# Altium PCB 驱动.PcbDoc
Units mil, origin at the board's own origin, x right, y up, seen from the top; angles counter-clockwise.
Board outline 8132 x 3728 mil, 2 copper layers (Top Layer, Bottom Layer); 46 components, 43 nets, 205 pads, 134 vias.
Unrouted connection lines stored in the file: 2.
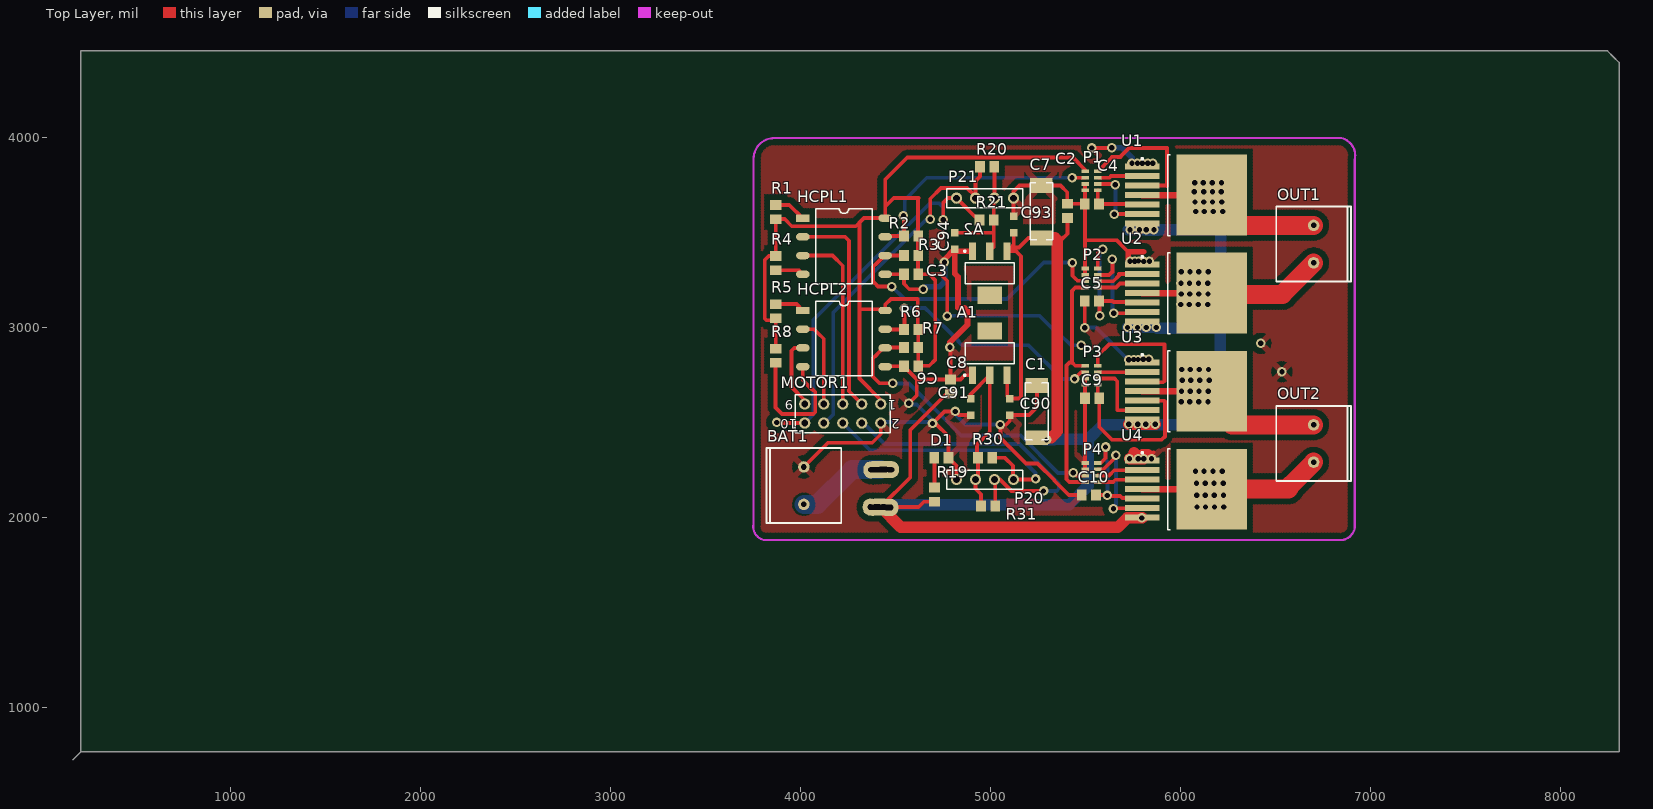
[diagram p0: Top Layer view]
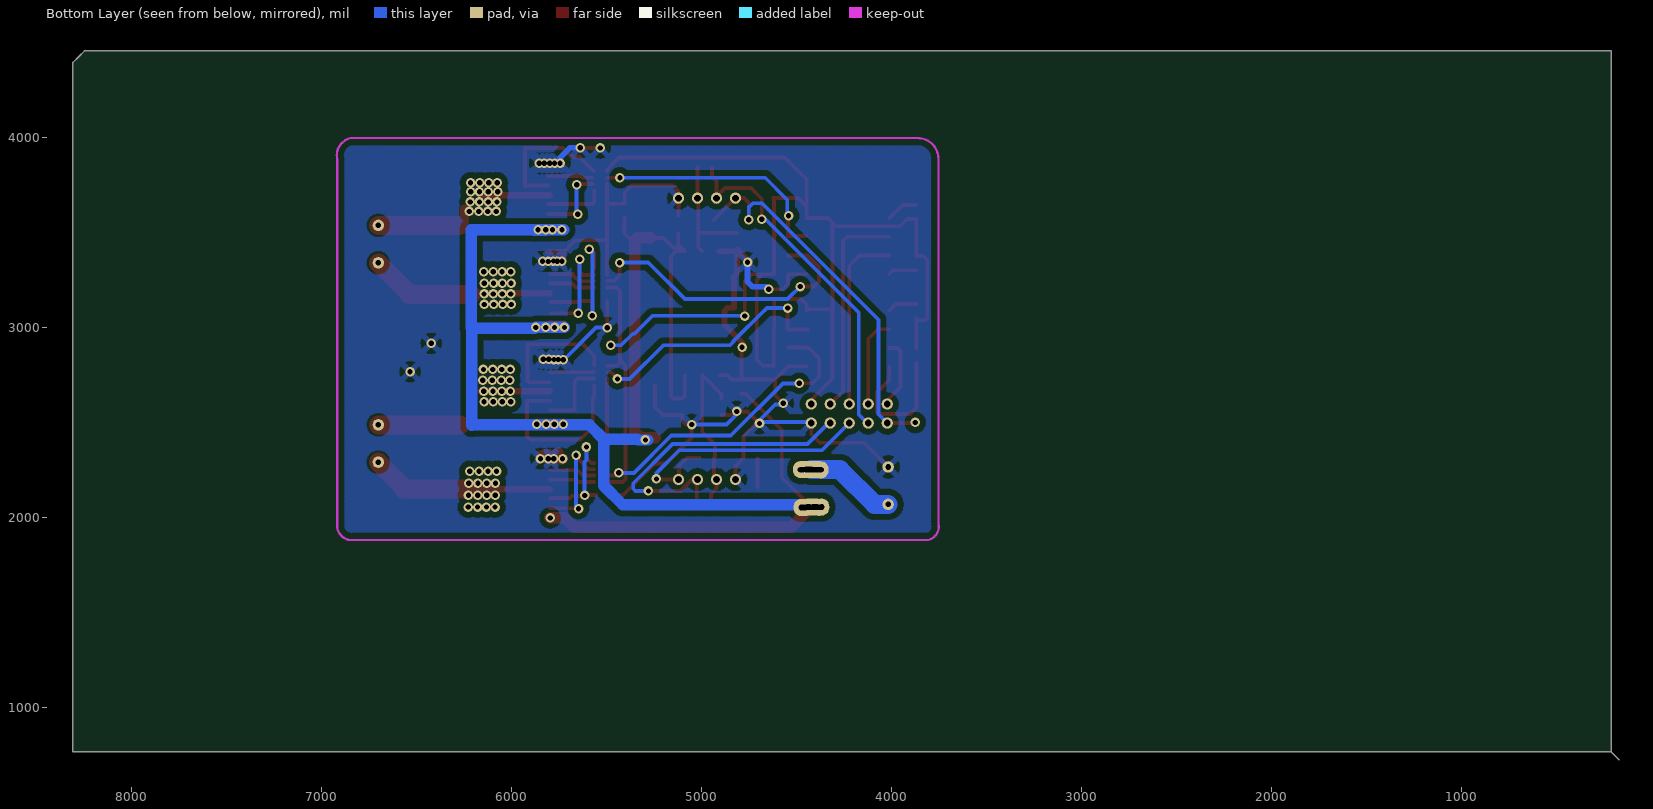
[diagram p1: Bottom Layer view, seen from below]

## Layer stack, top to bottom
Top Layer: signal copper 1.4
Dielectric: dielectric 12.6, FR-4, Dk 4.8
Bottom Layer: signal copper 1.4

## Board outline
215,4455 8246,4455 8276,4425 8306,4395 8306,768 215,768 174,727 215,768 215,4455

## Design rules (kind name [scope] priority, off if disabled: settings)
Clearance [All] p1: gap=30
FabricationTestPointUsage TestPointUsage [All] p1: valid=0 allowmultiple=FALSE
FabricationTestpoint Testpoint [All] p1: side=3 testpointundercomponent=TRUE minsize=40 maxsize=100 preferedsize=60 minholesize=0 maxholesize=40 preferedholesize=32 testpointgrid=1 allowsidetop=TRUE allowsidebottom=TRUE usegrid=TRUE gridtolerance=0.01
PlaneConnect [All] p1: planeconnectstyle=Relief reliefexpansion=20 reliefentries=4 reliefconductorwidth=30 reliefairgap=15
PolygonConnect [All] p1: connectstyle=Relief reliefconductorwidth=30 reliefentries=4 polygonreliefangle="45 Angle"
RoutingVias [All] p1: holewidth=28 width=50 viastyle="Through Hole" minholewidth=28 minwidth=50 maxholewidth=28 maxwidth=50
SilkscreenOverComponentPads [All] p1: minsilkscreentomaskgap=10
SolderMaskExpansion [All] p1: expansion=4
Width [All] p1: maxlimit=100 minlimit=15 preferedwidth=20
24 further rules are at their usual default settings.

## Components (designator, comment, footprint, x,y, rotation, side; value= is the part's Value field where it differs from the comment)
A1 "其它" AMS1117——5v电源#1 4996,2866 r90 top
A2 "其它" AMS1117——5v电源#2 4996,3286 r270 top
BAT1 "Header 2" 接口2 4018,2267.3 r0 top
C1 "Cap Pol1" CAPM6130X20N 5244,2526 r90 top
C2 "Cap" 2012[0805] 5405,3614 r270 top
C3 "Cap" 2012[0805] 4582,3281 r0 top
C4 "Cap" 2012[0805] 5533,3650 r180 top
C5 "Cap" 2012[0805] 5533,3139.33 r180 top
C6 "Cap" 2012[0805] 4582,2797 r180 top
C7 "Cap Pol1" CAPM6130X20N 5268,3577 r90 top
C8 "Cap" 2012[0805] 4790,2690 r270 top
C9 "Cap" 2012[0805] 5535,2629 r180 top
C10 "Cap" 2012[0805] 5517,2119 r180 top
C90 "钽电容" 10uF的钽电容 5101,2627 r270 top
C91 "22钽电容" 10uF的钽电容 4895,2627 r270 top
C93 "钽电容" 10uF的钽电容 5122,3499 r90 top
C94 "22钽电容" 10uF的钽电容 4812,3499 r270 top
D1 "LED0" M0805 4704,2315 r0 top
HCPL1 "" HCPL2630 4012.93,3576 r0 top
HCPL2 "" HCPL2630 4012.93,3090 r0 top
MOTOR1 "dianji" HDR2X5 4423,2598 r180 top
OUT1 "Header 2" 接口2 6700,3341 r180 top
OUT2 "Header 2" 接口2 6700,2292 r180 top
P1 "Header 4X2H" 排阻 5531,3772 r270 top
P2 "Header 4X2H" 排阻 5531,3260.67 r90 top
P3 "Header 4X2H" 排阻 5531,2749 r270 top
P4 "Header 4X2H" 排阻 5531,2238 r90 top
P20 "Header 4" HDR1X4 4821,2201 r0 top
P21 "Header 4" HDR1X4 5121,3681 r180 top
R1 "Res2" 2012[0805] 3870,3608 r270 top
R2 "Res2" 2012[0805] 4582,3482 r180 top
R3 "Res2" 2012[0805] 4582,3380 r180 top
R4 "Res2" 2012[0805] 3870,3339 r90 top
R5 "Res2" 2012[0805] 3870,3086 r270 top
R6 "Res2" 2012[0805] 4582,2990 r180 top
R7 "Res2" 2012[0805] 4583,2896 r180 top
R8 "Res2" 2012[0805] 3870,2852 r90 top
R19 "Res2" 2012[0805] 4706,2121 r270 top
R20 "Res Semi" 2012[0805] 4982,3846 r0 top
R21 "Res Semi" 2012[0805] 4980,3566 r0 top
R30 "Res Semi" 2012[0805] 4972,2315 r180 top
R31 "Res Semi" 2012[0805] 4988,2061.38 r180 top
U1 "BTS7971B" TO127P1615X238-8N 6023,3687 r270 top
U2 "BTS7971B" TO127P1615X238-8N 6023,3171.33 r270 top
U3 "BTS7971B" TO127P1615X238-8N 6023,2655.67 r270 top
U4 "BTS7971B" TO127P1615X238-8N 6023,2140 r270 top

## Footprints (in the part's own frame and the unit in brackets; to place one, negate y for a bottom-side part, rotate by r counter-clockwise, add the part's x,y. Pads: shape width x height; smd on the part's side, far side on the other; paste and mask are expansions set on the pad)
10uF的钽电容 [mm]
  rect 1x1 smd: 1(0,0) 2(2.21,0)
2012[0805] [mm] "Chip Resistor; Body 2.0 x 1.3 mm"
  rect 1.3x1.5 smd: 1(-0.95,0) 2(0.95,0)
AMS1117——5v电源#1 [mm] "SOT223, 4-Leads, Body 6.5x7.3mm (max), Pitch 2.30m"
  rect 2.3x0.95 smd: 1(-2.95,2.3) 2(-2.95,0) 3(-2.95,-2.3)
  rect 2.3x3.3 smd: 4(2.95,0)
  silkscreen extent -3.07,-3.25 1.4,3.45, body extent -1.9,-3.25 1.9,3.25, height 1.8
AMS1117——5v电源#2 [mm] "SOT223, 4-Leads, Body 6.5x7.3mm (max), Pitch 2.30m"
  rect 2.3x0.95 smd: 1(-2.95,-2.3) 2(-2.95,0) 3(-2.95,2.3)
  rect 2.3x3.3 smd: 4(2.95,0)
  silkscreen extent -3.07,-3.45 1.4,3.25, body extent -1.9,-3.25 1.9,3.25, height 1.8
CAPM6130X20N [mm] "Molded Capacitor, 2-Leads, Body 6.1x3.0mm, IPC Medi"
  rect 2x3 smd: 1(-2.675,0) 2(4.318,0)
  silkscreen extent -2.92,-1.52 4.7,1.52, body extent -3.1,-1.5 4.95,1.5, height 2
HCPL2630 [mm]
  rect 1.8x1 smd: 1(0,0)
  oval 1.8x1 smd: 2(0,-2.5) 3(0,-5) 4(0,-7.5) 5(11,-7.5) 6(11,-5) 7(11,-2.5) 8(11,0)
  silkscreen extent 1.74,-8.75 9.27,1.25
HDR1X4 [mm] "Connector; Header; 4 Posit"
  round 1.5 hole 0.9: 1(0,0) 2(2.54,0) 3(5.08,0) 4(7.62,0)
  silkscreen extent -1.27,-1.27 8.89,1.27
HDR2X5 [mm] "Connector; Header; 5x2 Posit"
  round 1.5 hole 0.9: 1(0,0) 2(0,2.54) 3(2.54,0) 4(2.54,2.54) 5(5.08,0) 6(5.08,2.54) 7(7.62,0) 8(7.62,2.54) 9(10.16,0) 10(10.16,2.54)
  silkscreen extent -1.27,-1.27 11.43,3.81
M0805 [mm]
  rect 1.3x1.5 smd: 1(0,0) 2(1.9,0)
TO127P1615X238-8N [mm]
  rect 0.8x4.6 smd: 1(-4.064,-5.723) 2(-2.794,-5.723) 3(-1.524,-5.723) 4(-0.254,-5.723) 5(1.016,-5.723) 6(2.286,-5.723) 7(3.556,-5.723)
  rect 10.8x9.4 smd: 8(-0.254,3.577)
  silkscreen extent -5.65,-5.85 5.15,-1.97
排阻 [mm]
  rect 0.5x1 smd: 1(-1.27,-0.847) 2(-1.27,0.847) 3(-0.423,-0.847) 4(-0.423,0.847) 5(0.423,-0.847) 6(0.423,0.847) 7(1.27,-0.847) 8(1.27,0.847)
接口2 [mil]
  round 60 hole 30: 1(0,0) 2(0,-196.85)
  silkscreen extent -197,-295 197,98

## Part data
A1 A2: library part ASM1117——5v电源芯片
C1 C7: "Polarized Capacitor (Radial)"
C2 C3 C4 C5 C6 C8 C9 C10: "Capacitor"
D1: "Typical INFRAR"
HCPL1 HCPL2 U1 U2 U3 U4: library part C
MOTOR1: library part "Header 5X2", "Header, 5-Pin, Dual row"
P1 P2 P3 P4: "Header, 4-Pin, Dual row,"
P20 P21: "Header, 4-Pin"
R1 R2 R3 R4 R5 R6 R7 R8 R19: "Resistor"
R20 R21 R30 R31: "Semiconductor Resistor"

## Free pads (board coordinates)
  oval 80x90 hole 30: 0(4371,2252) 1(4381,2253) 2(4391,2253) 3(4404,2253) 4(4413,2253) 5(4422,2253.36) 6(4422,2253.36) 7(4440,2254) 8(4430,2254) 9(4450,2254) 10(4450,2254) 11(4468,2253) 12(4468,2253) 13(4468,2253) 14(4479,2253) 15(4468,2253) 16(4468,2253) 17(4368,2056) 18(4368,2056) 19(4381,2055) 20(4381,2055) 21(4381,2055) 22(4393,2056) 23(4404,2056) 24(4422,2055.72) 25(4413,2056) 26(4404,2056) 27(4432,2056) 28(4432,2056) 29(4441,2056) 30(4441,2056) 31(4453,2054) 32(4462,2054) 33(4462,2054) 34(4476,2054) 35(4453,2054) 36(4453,2054)

## Via types
v1: diameter 50, hole 28, Top Layer to Bottom Layer, 134 vias

## Nets (pads, with @x,y where several pads share a name; then routed paths per layer and width w, separated by ;. In a path a pad name is that pad's centre, name@x,y a point inside that pad or via, vN(x,y) a via of type N, cw(c..) or ccw(c..) an arc to the next point about the centre after c; other vN are vias at no path point)
5V: C3.2 C6.1 HCPL1.8 HCPL2.8 MOTOR1.1 P1.1 P2.2 P3.1 P4.2 R1.2 R2.1 R3.1 R4.2 R5.2 R6.1 R7.1 R8.2 | length 7998.7
  Top Layer w20: R8.2 R5.2 ; R5.2@3870,3039 3822,3039 3813,3048 3813,3356 3833.4,3376.4 R4.2 R1.2 3917.4,3570.6 3955,3533 4291,3533 4334,3576 HCPL1.8 4446,3778 4562,3894 5434,3894 5497.67,3830.33 P1.1 ; 4310.72,3096.28 4439.72,3096.28 HCPL2.8 4446,3120 4477,3151 4617,3151 4617,2992.4 4620.4,2989 C6.1@4620.4,2798 ; 4310.72,3552.72 4310.72,2732.28 4423,2620 MOTOR1.1 ; 4446,3636 4491,3681 4622,3681 4619.4,3678.4 C3.2 4737,3281 4773,3245 v1(4773,3061) ; R2.1@4613,3488.4 R2.1 ; C6.1@4621.4,2799 4678,2799 4709,2830 4709,3250 4678,3281 ; P4.2 5414,2188 5400,2202 5400,2801 5416,2817 5428,2817 ; P3.1 5446,2799 5428,2817 ; P2.2 5445.67,3210.67 5428,3193 5428,2817
  Bottom Layer w20: v1@4773,3062 5258,3062 5352,2968 5362,2968 5423,2907 v1(5478,2907)
BAT: BAT1.2 pad.0 pad.1 pad.2 pad.3 pad.4 pad.5 pad.6 pad.7 pad.8 pad.9 pad.10 pad.11 pad.12 pad.13 pad.14 pad.15 pad.16 | length 479.8
  Bottom Layer w100: BAT1.2 4089.45,2070.45 4272.36,2253.36 pad.5
"BAT IN": A1.3 A2.3 C1.1 C2.2 C7.1 C8.2 C90.1 C93.1 pad.17 pad.18 pad.19 pad.20 pad.21 pad.22 pad.23 pad.24 pad.25 pad.26 pad.27 pad.28 pad.29 pad.30 pad.31 pad.32 pad.33 pad.34 pad.35 pad.36 R19.2 U1.7 U2.7 U3.7 U4.7 | length 9822.9
  Top Layer w20: R19.2 4650.6,2083.6 4622.72,2055.72 pad.24 4578,2211.72 4578,2461 4769.6,2652.6 C8.2 ; A1.3@5088.55,2749.86 5088.55,2639.45 C90.1 5148,2627 5160,2639 5160,3375 5146,3389 5146,3390 5133.86,3402.14 A2.3 5122,3437.59 C93.1 ; 5106.41,3422 5150.63,3422 5200.31,3471.69 C7.1 ; 5345,3466 5377,3466 5405,3494 C2.2 ; v1(5721,3001) 5721,3028 5794.35,3028 U2.7 ; v1@5728,2488 v1(5728,2492)
  Top Layer w60: pad.24 4527.72,1950 5670,1950 5720,2000 U4.7 ; C1.1 5318.69,2420.69 5352,2454 5352,3459 5339.31,3471.69 C7.1 ; v1(5728,2492) v1(5866,2492)
  Bottom Layer w60: pad.24 4435.28,2069 5415,2069 5514,2168 5514,2413 ; v1@5282,2409 5333,2409 5337,2413 5514,2413 ; v1(5721,3001) v1(5872,3001) 5877,2996 6208,2996 ; v1@5725,3515 v1@5874,3515 ; v1@5822,3512 5880,3512 5883,3515 6211,3515 6211,2999 6208,2996 ; 5514,2413 5589,2488 6206,2488 6208,2486 6208,2996
  other v1: 5796,1999 5295,2409 5775,2492 5816,2492 5773,3001 5820,3001 5734,3515 5784,3515 5820,3515 5860,3515
DIANJI1-5V: A2.2 C94.1 P21.2 R20.2 R21.2 | length 658.4
  Top Layer w20: C94.1 5016.4,3499 5017.4,3500 ; A2.2 5017.4,3423.54 5017.4,3677.4 P21.2 R20.2@5021,3844.4
DIANJI-5V: A1.2 C91.1 P20.2 R30.2 R31.2 | length 848.4
  Top Layer w20: C91.1 4895,2648.86 A1.2 4996,2452 4929,2385 R30.2@4929,2320.6 ; P20.2 4921,2153 4950.6,2123.4 R31.2@4950.6,2087 ; P20.2@4934.6,2214.6 R30.2
GND: A1.1 A2.1 BAT1.1 C1.2 C2.1 C3.1 C4.2 C5.2 C6.2 C7.2 C8.1 C9.2 C10.2 C90.2 C91.2 C93.2 C94.2 D1.2 HCPL1.5 HCPL2.5 MOTOR1.2 P1.5 P1.7 P2.6 P2.8 P3.5 P3.7 P4.6 P4.8 P20.1 P21.1 U1.1 U2.1 U3.1 U4.1 | length 7758.1
  Top Layer w20: BAT1.1 4144.7,2394 4378,2394 4423,2439 MOTOR1.2 ; HCPL1.5@4446.28,3281 C3.1 4544.6,3230.4 4573,3202 v1(4647,3202) ; HCPL2.5@4448.28,2797 C6.2 4544.6,2795.4 4612.6,2727.4 ; v1(4569.5,2601.5) 4612.6,2644.6 4612.6,2727.4 ; v1(4787,2896) 4790,2893 C8.1 ; P20.1 4821,2272.8 D1.2 4778.8,2428.2 4711,2496 v1(4695,2496) 4758,2559 v1(4815,2559) 4834,2540 C91.2 ; A1.1 4864.86,2749.86 4842.4,2727.4 4612.6,2727.4 ; v1(5052,2490) 5052,2420 5186,2286 5248,2286 5335.03,2198.97 5335.03,2195.97 5412,2119 ; 5083,2490 5101,2508 C90.2 5202,2540 5244,2582 C1.2 ; C93.2@5121,3602 5121,3716 5152,3747 5369,3747 5404,3712 5404,3652.4 C2.1 C4.2@5494.2,3651.4 ; P21.1 P21.1@5137,3665 ; C93.2 5122,3612 ; 5415,2119 C10.2 ; v1(5495.6,3000) C5.2 ; C9.2 5497.6,2288.07 P4.8 P4.6 ; 5497.6,3460 5663,3460 5724,3399 ; P1.7@5497.6,3712.93 5497.6,3310.73 P2.8 P2.6 ; C9.2@5497.67,2629.07 P3.5 ; P1.7 P1.5 ; v1(5533,3945) v1@5637,3945 ; v1(5847,2311) 5847,2333 5858,2344
  Top Layer w30: v1(4758,3343) 4758,3358 C94.2 4812,3283.78 4829,3266.78 4829,3104 4862,3104 4879,3087 4879,3015 4787,2923 v1(4787,2896) ; C94.2@4821.86,3402.14 A2.1 ; v1(5734,3349) 5724,3359 5724,3399 5805,3399
  Top Layer w60: v1(5731,2311) v1(5777,2311) 5790,2324 5793,2324 5800,2331 5827,2331 5807,2311 5786,2311 5755,2342 5755,2335
  Bottom Layer w20: MOTOR1.2@4429,2504 4687,2504 v1(4695,2496) 4695,2512.29 4612,2595.29 4575.71,2595.29 v1(4569.5,2601.5) ; v1(4815,2559) 4815,2543 4868,2490 v1(5052,2490) ; v1(5495.6,3000) 5554.48,3000 v1@5723.48,2831
  Bottom Layer w30: v1@4660,3215 4732,3215 4758,3241 v1(4758,3343) ; v1(5638,3946) 5691,3946 5744,3893 v1(5744,3864)
  other v1: 5806,2311 6533,2768 5727,2831 5753,2832 5776,2832 5803,2833 5832,2833 6422,2917 5807,3348 5758,3349 5836,3349 5779,3350 5773,3864 5799,3864 5828,3864 5853,3864
N1: HCPL1.7 P1.3 R2.2 | length 1280.5
  Top Layer w20: HCPL1.7@4450.43,3482 R2.2 v1@4544.6,3585.4 ; v1(5429,3788) P1.3@5497,3788
  Bottom Layer w20: v1(4542,3588) 4549,3595 4549,3672 4665,3788 v1(5429,3788)
N2: HCPL1.6 P2.4 R3.2 | length 1576.8
  Top Layer w20: v1(4481,3216) 4409,3216 4391,3234 4389,3234 4382,3241 4382,3320 4400,3338 4401,3338 4443,3380 R3.2 ; v1(5431,3341) 5431,3273 5450,3254 ; 5451,3254 5459,3246 5495.67,3246 P2.4
  Bottom Layer w20: v1(4481,3216) 4547,3150 5087,3150 5280,3343 v1@5429,3343
N3: HCPL2.7 P3.3 R6.2 | length 1319.5
  Top Layer w20: HCPL2.7@4440.57,2991.57 4439,2990 R6.2 ; R6.2@4547,2992.4 v1(4547,3103) ; v1(5442,2730) 5477.67,2765.67 P3.3
  Bottom Layer w20: v1(4547,3103) 4656,3103 4666,3093 4667,3093 4831,2929 4831,2926 4850,2907 5200,2907 5378,2729 v1@5421,2729
N4: HCPL2.6 P4.4 R7.2 | length 1611.5
  Top Layer w20: HCPL2.6 4436.15,2893.15 4400,2857 4400,2856 4381,2837 4381,2742 4416,2707 v1(4486,2707) ; HCPL2.6@4448.85,2896 R7.2 ; v1(5436,2236) 5450.67,2221.33 P4.4
  Bottom Layer w20: v1@4487,2706 4572,2706 4846,2432 5159,2432 5355,2236 v1(5436,2236)
NetC4_1: C4.1 P1.8 U1.5 | length 307.6
  Top Layer w20: P1.8 5564.33,3658.07 5572.4,3650 U1.5@5804.69,3650
NetC5_1: C5.1 P2.7 U2.5 | length 774.1
  Top Layer w20: P2.7 5564.33,3392.33 5585,3413 v1(5591,3413) ; C5.1 5641.67,3139.33 5646,3135 U2.5@5794.02,3135 ; v1(5574,3062) C5.1@5574,3135.73
  Bottom Layer w20: v1(5574,3062) 5574,3396 v1(5591,3413)
NetC9_1: C9.1 P3.8 U3.5 | length 911.8
  Top Layer w20: P3.8 5564.33,2637.07 C9.1 5572.4,2477.6 5614,2436 5614,2435 5639,2410 5900,2410 5918,2428 5918,2611.33 5913.67,2615.67 U3.5
NetC10_1: C10.1 P4.7 U4.5 | length 614.7
  Top Layer w20: C10.1 v1@5613,2119 ; P4.7 5580,2288 5605,2313 v1(5605,2372) ; v1@5617,2115 5681,2115 5693,2103 5794.69,2103 U4.5
  Bottom Layer w20: v1(5605,2372) 5605,2304 5615,2294 v1(5615,2117)
NetD1_1: D1.1 R19.1 | length 154.6
  Top Layer w20: R19.1 D1.1@4706,2313
NetHCPL1_1: HCPL1.1 R1.1 | length 169.7
  Top Layer w20: R1.1 3941.6,3645.4 HCPL1.1@4011,3576
NetHCPL1_4: HCPL1.4 R4.1 | length 151.6
  Top Layer w20: R4.1 3992.06,3301.6 HCPL1.4
NetHCPL2_1: HCPL2.1 R5.1 | length 156.8
  Top Layer w20: R5.1 3979.53,3123.4 HCPL2.1
NetHCPL2_4: HCPL2.4 R8.1 | length 727.7
  Top Layer w20: R8.1@3869,2813.6 3869,2580 3903,2546 4068,2546 4078,2556 4078,2661 4064,2675 4062,2675 4012.93,2724.07 HCPL2.4
NetP1_2: P1.2 U1.3 | length 740
  Top Layer w20: P1.2 5566,3822 5633,3889 5634,3889 5639.62,3898 5684,3898 5688.38,3905 5728.38,3945 5929,3945 5929,3745 5927,3747 U1.3@5807.69,3747
NetP1_4: P1.4 U1.2 | length 237.8
  Top Layer w20: P1.4@5573.33,3788.67 5625.67,3788.67 5634,3797 U1.2@5807.69,3797
NetP1_6: P1.6 U1.6 | length 399.2
  Top Layer w20: P1.6@5573.33,3755.33 5653.67,3755.33 v1(5657,3752) ; v1(5651,3597) U1.6@5807.69,3597
  Bottom Layer w20: v1(5651,3597) 5657,3603 v1(5657,3752)
NetP2_1: P2.1 U2.3 | length 241.9
  Top Layer w20: P2.1 5660.67,3210.67 5681.33,3231.33 U2.3
NetP2_3: P2.3 U2.2 | length 253.3
  Top Layer w20: P2.3 5646,3244 5675.67,3273.67 5675.67,3281.33 U2.2
NetP2_5: P2.5 U2.6 | length 591.4
  Top Layer w20: P2.5 5623.33,3277.33 5639,3293 5641,3293 v1(5641,3359) v1@5629,3359 ; v1(5648,3076) U2.6@5792.35,3076
  Bottom Layer w20: v1(5641,3359) 5641,3083 v1(5648,3076)
NetP3_2: P3.2 U3.3 | length 739.8
  Top Layer w20: P3.2 5564.33,2852.33 5624,2912 5915.67,2912 5915.67,2719.67 5909,2713 U3.3@5800.35,2713
NetP3_4: P3.4 U3.2 | length 233.4
  Top Layer w20: P3.4 U3.2
NetP3_6: P3.6 U3.6 | length 392.6
  Top Layer w20: P3.6 5652.67,2732.33 5667,2718 5667,2565 5667.67,2565.67 U3.6
NetP4_1: P4.1 U4.3 | length 238.3
  Top Layer w20: P4.1 5644,2188 5656,2200 U4.3
NetP4_3: P4.3 U4.2 | length 245.8
  Top Layer w20: P4.3 5623.33,2221.33 5623.33,2222.33 5651,2250 U4.2
NetP4_5: P4.5 U4.6 | length 547.8
  Top Layer w20: P4.5 5593.67,2254.67 5660,2321 v1(5660,2329) ; v1@5649,2050 U4.6
  Bottom Layer w20: v1@5660,2061 v1(5660,2329)
  other v1: 5647,2048
OUT1: OUT1.2 U1.4 U1.8 | length 887
  Top Layer w35: U1.4 U1.8
  Top Layer w50: U1.8@6249,3621.83 6249,3562 U1.8@6273.15,3537.85
  Top Layer w100: U1.8@6273.15,3537.85 OUT1.2
  other v1: 6080,3611 6125,3611 6172,3611 6221,3611 6076,3661 6121,3661 6168,3661 6217,3661 6072,3714 6122,3714 6168,3714 6214,3714 6074,3762 6119,3762 6166,3762 6215,3762
OUT2: OUT1.1 U2.4 U2.8 | length 924.5
  Top Layer w35: U2.4 U2.8
  Top Layer w100: U2.8@6212,3174 6535,3174 6535,3176 OUT1.1
  other v1: 6001,3122 6046,3122 6093,3122 6142,3122 6003,3177 6048,3177 6095,3177 6144,3177 6002,3234 6047,3234 6094,3234 6143,3234 6004,3294 6049,3294 6096,3294 6145,3294
OUT3: OUT2.2 U3.4 U3.8 | length 796
  Top Layer w35: U3.4 U3.8
  Top Layer w100: U3.8@6270.15,2488.85 OUT2.2
  other v1: 6003,2610 6048,2610 6095,2610 6144,2610 6005,2665 6050,2665 6097,2665 6146,2665 6009,2723 6054,2723 6101,2723 6150,2723 6006,2780 6051,2780 6098,2780 6147,2780
OUT4: OUT2.1 U4.4 U4.8 | length 921.4
  Top Layer w35: U4.4 U4.8
  Top Layer w100: U4.8@6205.83,2152 6568,2152 6579,2171 OUT2.1
  other v1: 6086,2056 6131,2056 6178,2056 6227,2056 6085,2119 6130,2119 6177,2119 6226,2119 6084,2182 6129,2182 6176,2182 6225,2182 6078,2244 6123,2244 6170,2244 6219,2244
PWM1: HCPL1.2 MOTOR1.3 | length 1138.1
  Top Layer w20: HCPL1.2@4013.36,3478 4235,3478 4256,3457 4256,2665 MOTOR1.3
PWM2: HCPL1.3 MOTOR1.5 | length 959.5
  Top Layer w20: HCPL1.3 4168.85,3379.15 4223,3325 MOTOR1.5
PWM3: HCPL2.2 MOTOR1.7 | length 474
  Top Layer w20: HCPL2.2 4071.43,2991.57 4095,2968 4096,2968 4123,2941 MOTOR1.7
PWM4: HCPL2.3 MOTOR1.9 | length 375.2
  Top Layer w20: HCPL2.3 3968.15,2893.15 3953,2878 3953,2688 4023,2618 MOTOR1.9
T1: MOTOR1.4 P20.3 R31.1 | length 1667.7
  Top Layer w20: MOTOR1.4 MOTOR1.4@4323,2501 ; P20.3 5050,2201 5111,2140 v1@5267,2140 ; R31.1@5025.4,2087 P20.3@5025.4,2196.6 ; v1@5267,2141 v1(5279,2141)
  Bottom Layer w20: MOTOR1.4@4332,2498 4442,2388 5152,2388 5359,2181 5359,2152 5348,2141 v1(5279,2141)
T2: MOTOR1.6 P20.4 R30.1 | length 1463.9
  Top Layer w20: R30.1 5077,2315 5119,2273 P20.4@5119,2203 ; P20.4 v1@5234,2201
  Bottom Layer w20: MOTOR1.6 4366,2355 5117,2355 5237,2235 v1(5237,2204)
T3: MOTOR1.8 P21.3 R20.1 | length 1875.6
  Top Layer w20: v1(4683,3570) 4683,3678 4740,3735 4877,3735 P21.3@4921,3691 ; P21.3 4921,3771 4944.6,3794.6 R20.1
  Bottom Layer w20: MOTOR1.8@4128,2498 4173,2543 4173,3079 4664,3570 v1(4683,3570)
T4: MOTOR1.10 P21.4 R21.1 | length 2049.7
  Top Layer w20: v1@3876,2498 MOTOR1.10 ; v1(4752,3568) 4752,3658 4775,3681 P21.4 R21.1@4936,3566
  Bottom Layer w20: MOTOR1.10 4069,2544 4069,3041 4682,3654 4729,3654 4752,3631 v1(4752,3568)
  other v1: 3876,2501
pads on no net: A1.4 A2.4

## Polygon pours and split planes (outlines as drawn)
GND on Bottom Layer "Keep-Out Layer-No Net" (hatched 90Degree grid 0 track 8, remove dead copper, pour order 4): 3720,4027 3732,4039 6935,4039 6935,1852 6917,1834 6894,1857 3726,1857 3726,4033
GND on Top Layer "Keep-Out Layer-No Net" (hatched 90Degree grid 0 track 8, remove dead copper, pour order 2): 3736,4044 3765,4073 6944,4073 6944,1791 6909,1826 3637,1826 3637,4052 3714,4129

## Keep-outs
Keep-Out Layer:
  lines w12: 3754,1966 ccw(c3822.5,1951.5) 3808,1883 6830,1883 ccw(c6840.5,1958.5) 6916,1948 6916,3886 ccw(c6825,3906) 6845,3997 3863,3997 ccw(c3862.5,3888.5) 3754,3889 3754,1966

## Silkscreen, mask and mechanical layers (free items; w line width, h text height)
Top Solder:
  lines w60: 4419.28,2053 4519.28,1953 5666,1953 5715,2002 5793,2002 ; 5276,3472 5337,3472 5352,3457 5352,2450 5311,2409 5295,2409 5305,2409
  lines w100: 4408,2053 4419.28,2053 ; 6243,2158 6566,2158 6700,2292 ; 6254,3566 6282.15,3537.85 6700,3537.85 ; 6273.15,2488.85 6700,2488.85 ; 6292,3176 6537,3176 6700,3339 6700,3341
Bottom Solder:
  lines w10: 4426.72,2051 4432,2051
  lines w60: 4422,2055.72 5414.72,2055.72 5525,2166 5525,2410 5524,2409 5295,2409 ; 5514,2409 5520,2409 5597,2486 5722,2486 5728,2492 5816,2492 6205,2492 6211,2498 6211,3002 6210,3001 5820,3001 5729,3001 ; 5724,3515 5784,3515 5860,3515 6207,3515 6211,3511 6211,2990
  lines w100: 4018,2070.45 4083.45,2070.45 4263,2250 4418.64,2250 4422,2253.36

## Text inside footprints (layer, text, board x,y; h text height)
MOTOR1: Top Overlay "10" at 3984,2519 h50 r180; Top Overlay "9" at 3963,2618 h50 r180; Top Overlay "1" at 4503,2618 h50 r180; Top Overlay "2" at 4523,2518 h50 r180